# Altium PCB Current Sense.PcbDoc
Units mil, origin at the board's own origin, x right, y up, seen from the top; angles counter-clockwise.
Board outline 2150 x 3130 mil, 2 copper layers (Top Layer, Bottom Layer); 26 components, 19 nets, 72 pads, 45 vias.
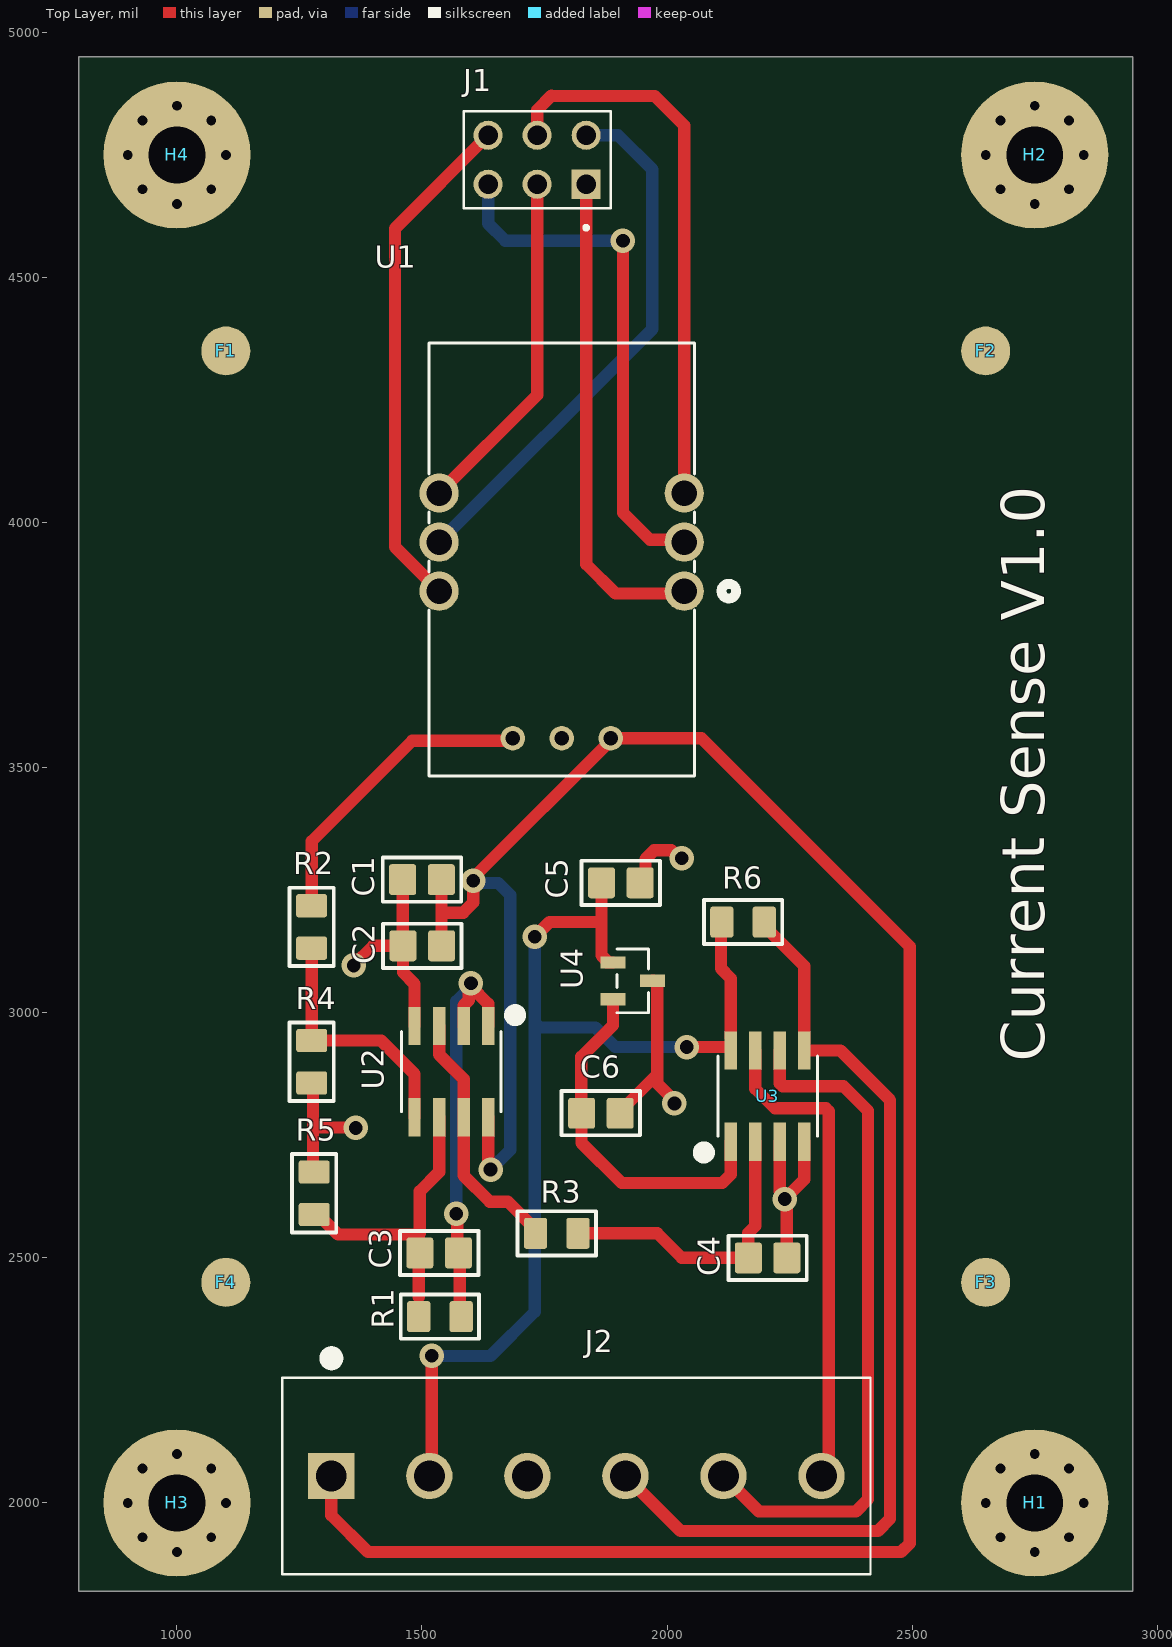
[diagram p0: Top Layer view]
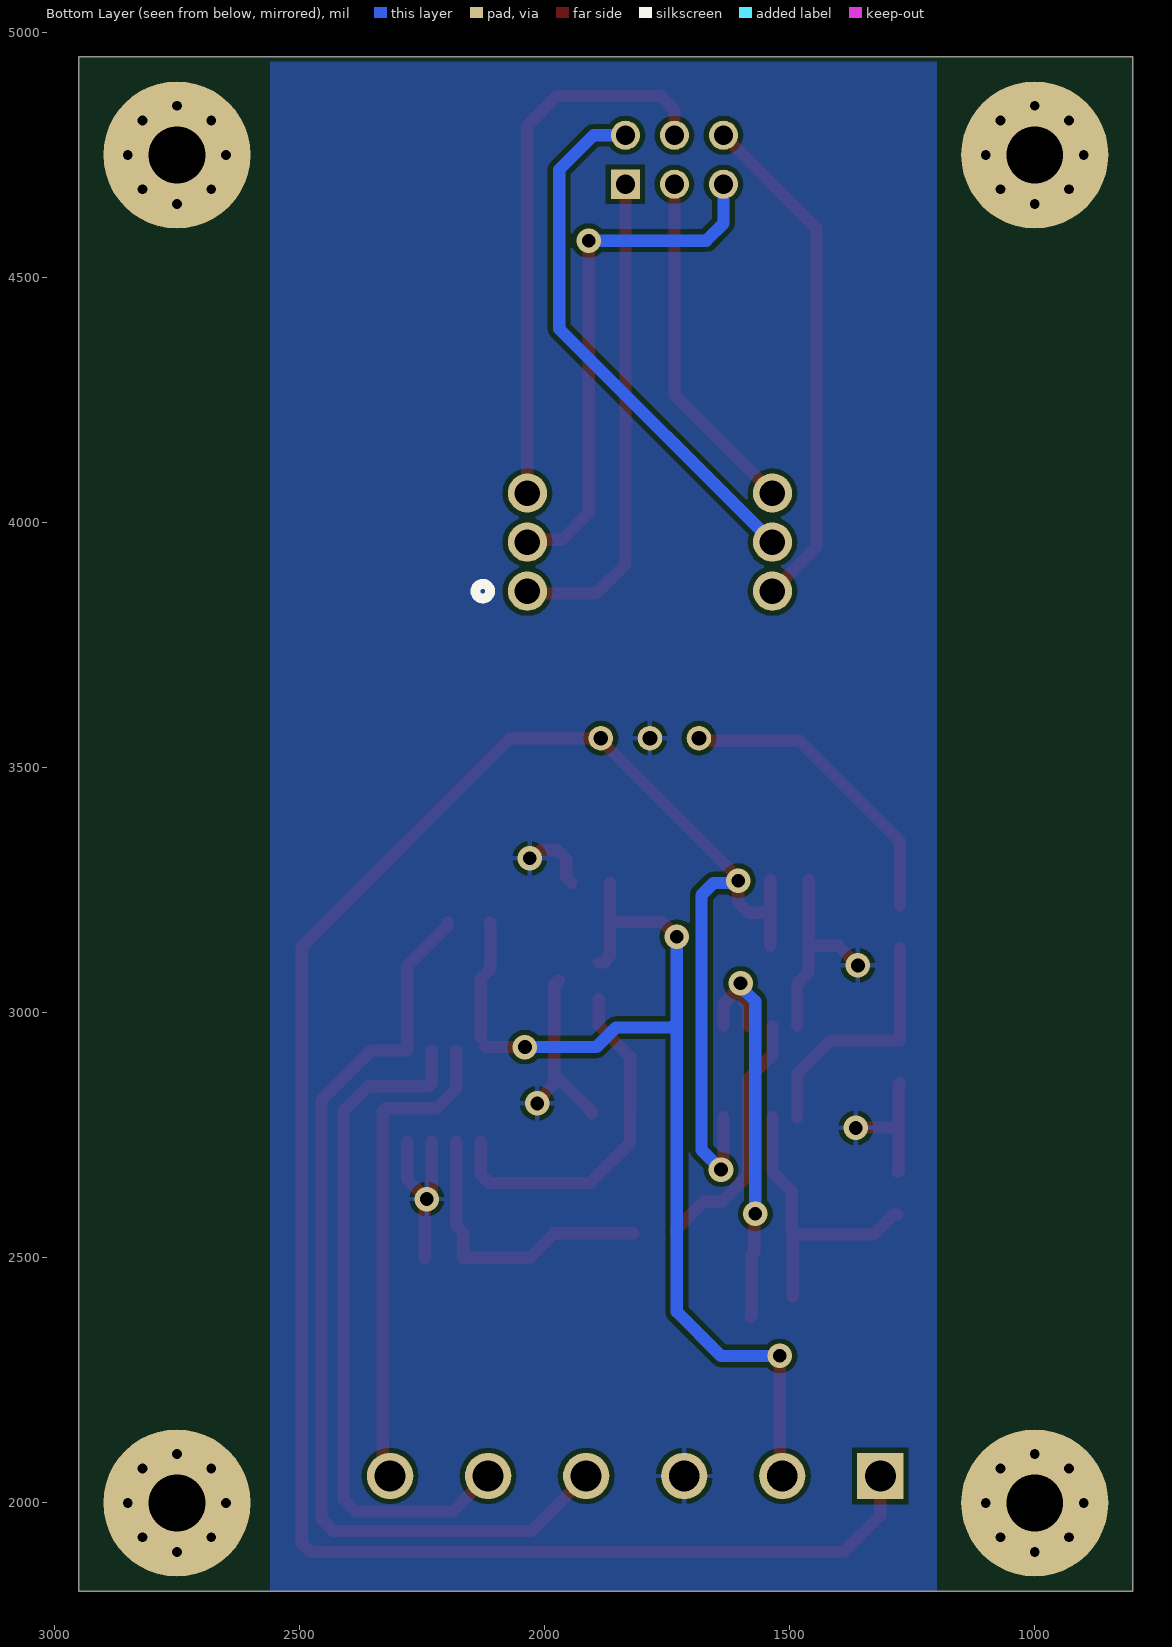
[diagram p1: Bottom Layer view, seen from below]
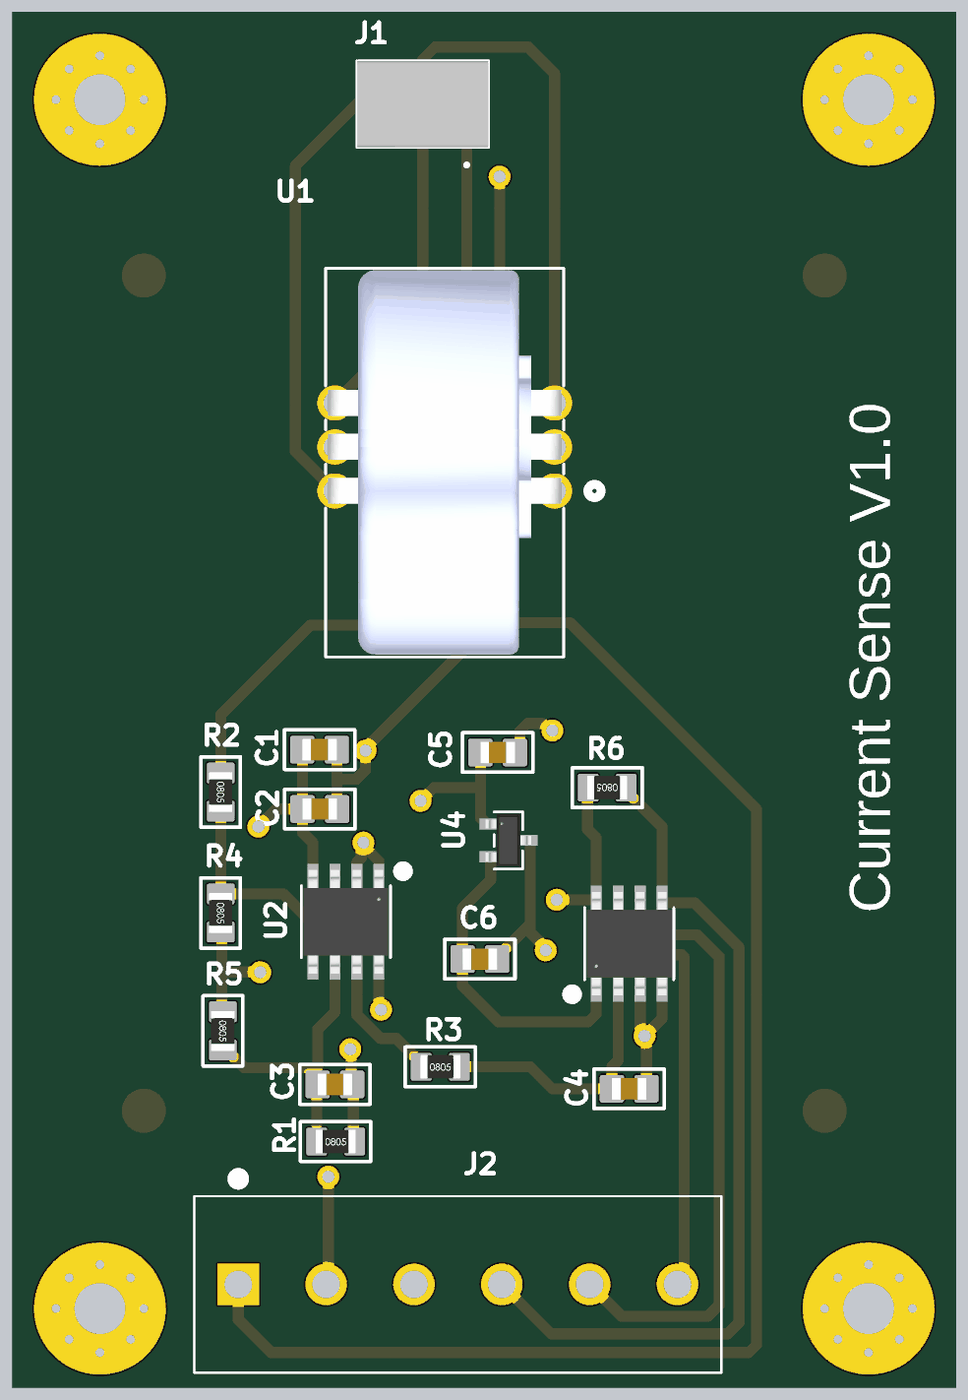
[diagram p2: 3D render of the assembled board from above, using the file's embedded part models]

## Layer stack, top to bottom
Top Solder: solder mask 0.4, Solder Resist, Dk 3.5
Top Layer: signal copper 1.4
Dielectric 1: dielectric 12.6, FR-4, Dk 4.8
Bottom Layer: signal copper 1.4
Bottom Solder: solder mask 0.4, Solder Resist, Dk 3.5

## Board outline
800,1820 2950,1820 2950,4950 800,4950

## Design rules (kind name [scope] priority, off if disabled: settings)
Clearance [All] p1: gap=10 ignorepadtopadclearanceinfootprint=FALSE except(0: Arc-Hole Track-Hole SMDPad-Hole THPad-Hole Via-Hole Fill-Hole Poly-Hole Region-Hole Text-Hole)
PolygonConnect [All] p1: connectstyle=Relief reliefconductorwidth=10 reliefentries=4 polygonreliefangle="90 Angle" airgapwidth=10
RoutingVias [All] p1: holewidth=28 width=50 viastyle="Through Hole" minholewidth=28 minwidth=50 maxholewidth=28 maxwidth=50
SolderMaskExpansion [All] p1: expansion=4 istentingtop=FALSE
Width [All] p1: maxlimit=50 minlimit=10 preferedwidth=20
30 further rules are at their usual default settings.

## Classes and differential pairs
net class Sense_A[0..5]: Sense_A0 Sense_A1 Sense_A2 Sense_A3 Sense_A4 Sense_A5

## Components (designator, comment, footprint, x,y, rotation, side; value= is the part's Value field where it differs from the comment)
C1 "0.1 uF" C0805E 1500,3271.5 r0 top
C2 "0.1 uF" C0805E 1500.63,3136.5 r0 top
C3 "0.01 uF" C0805E 1535,2510 r0 top
C4 "1 uF" C0805E 2205,2500 r180 top
C5 "0.1 uF" C0805E 1905.63,3265 r180 top
C6 "0.1 uF" C0805E 1865,2795 r180 top
F1 "Fiducial 200mil" FIDU_100mil 1100,4350 r0 top
F2 "Fiducial 200mil" FIDU_100mil 2650,4350 r0 top
F3 "Fiducial 200mil" FIDU_100mil 2650,2450 r0 top
F4 "Fiducial 200mil" FIDU_100mil 1100,2450 r0 top
H1 "4-40 Hole" "4-40 Hole" 2750,2000 r0 top
H2 "4-40 Hole" "4-40 Hole" 2750,4750 r0 top
H3 "4-40 Hole" "4-40 Hole" 1000,2000 r0 top
H4 "4-40 Hole" "4-40 Hole" 1000,4750 r0 top
J1 "826925-3 Header 3x2" TE_826925-3 1735,4740 r180 top
J2 "TB004-508-06BE" CUI_TB004-508-06BE 1315,2055 r0 top
R1 "56k" R0805E 1536.69,2380 r0 top
R2 "56k" R0805E 1275,3175 r270 top
R3 "100" R0805E 1775,2550 r0 top
R4 "20k" R0805E 1275,2900 r270 top
R5 "75k" R0805E 1280,2631.69 r270 top
R6 "10k" R0805E 2155,3185 r180 top
U1 "LTS6-NP" "LTS 6-NP_LEM" 2035,3860 r180 top
U2 "MCP6072T-E/SN" SOIC8-N_MC_MCH 1560,2880 r270 top
U3 "MCP3201T-CI/SN" SOIC8-N_MC_MCH 2205,2830 r90 top
U4 "MAX6106EUR+T" 21-0051H_MXM 1930,3065 r270 top

## Footprints (in the part's own frame and the unit in brackets; to place one, negate y for a bottom-side part, rotate by r counter-clockwise, add the part's x,y. Pads: shape width x height; smd on the part's side, far side on the other; paste and mask are expansions set on the pad)
"4-40 Hole" [mil]
  round 300 hole 116: 1(0,0)
21-0051H_MXM [mil]
  rect 25x51 smd paste+0 mask+0: 1(-37.4,-40.5) 2(37.4,-40.5) 3(0,40.5)
  silkscreen extent -65,-33 65,33, body extent -60,-52 60,52, height 44
C0805E [mm] "CHIP Capacitor, 2.0X1.3mm, 0805, EXPANDED PAD"
  rrect20% 1.4x1.6 smd mask+0.1: 1(-1,0) 2(1,0)
  Top Layer pour cut-out: -0.5,0.8 0.5,0.8 0.5,-0.8 -0.5,-0.8
  silkscreen extent -2.03,-1.14 2.03,1.14, body extent -1,-0.62 1,0.63, height 1
CUI_TB004-508-06BE [mm]
  rect 2.4x2.4 / inner round 2.4 / far side rect 2.4x2.4 hole 1.6: 1(0,0)
  round 2.4 hole 1.6: 2(5.08,0) 3(10.16,0) 4(15.24,0) 5(20.32,0) 6(25.4,0)
  silkscreen extent -2.54,-5.1 27.94,6.4
FIDU_100mil [mil]
  round 100 smd paste-500 mask-500: 1(0,0)
"LTS 6-NP_LEM" [mil]
  round 80 hole 52 mask+0: 1(0,0) 2(0,-100) 3(0,-200) 4(500,-200) 5(500,-100) 6(500,0)
  round 50 hole 30: 7(150,300) 8(250,300) 9(350,300)
  silkscreen extent -106,-507 521,377, body extent -15,-502 516,372, height 945
R0805E [mm] "CHIP RESISTOR 1/8 WATT ,2.0X1.3mm, 0805, EXPANDED PAD"
  rrect20% 1.2x1.6 smd mask+0.1: 1(-1.1,0) 2(1.1,0)
  Top Layer pour cut-out: -0.5,0.8 0.5,0.8 0.5,-0.8 -0.5,-0.8
  silkscreen extent -2.03,-1.14 2.03,1.14, body extent -1.15,-0.67 1.15,0.68, height 0.76
SOIC8-N_MC_MCH [mil]
  rect 78x25 smd paste+0 mask+0: 1(-93,75) 2(-93,25) 3(-93,-25) 4(-93,-75) 5(93,-75) 6(93,-25) 7(93,25) 8(93,75)
  silkscreen extent -125,-102 82,140, body extent -118,-96 118,96, height 69
TE_826925-3 [mm]
  rect 1.508x1.508 hole 1: 1(-2.54,1.27)
  round 1.508 hole 1: 2(0,1.27) 3(2.54,1.27) 4(-2.54,-1.27) 5(0,-1.27) 6(2.54,-1.27)
  silkscreen extent -3.81,-2.52 3.81,3.62, body extent -3.81,-2.5 3.81,2.5, height 9.51

## Part data
C1 C2 C5 C6: library part 08055C104JAT2A, "0805 100nF 50 V ±5 % Tolerance X7R Surface Mount Multilayer Ceramic Capacitor", Capacitance=100nF, Case Code (Imperial)=0805, Case Code (Metric)=2012, Dielectric=X7R, Dielectric Material=Ceramic, Insulation Resistance=100GR, Manufacturer="Kyocera AVX", Max Operating Temperature=125°C, Min Operating Temperature=-55°C, Package Quantity=4000, Supplier Part Number 1=478-3352-1-ND, Tolerance=5%, Voltage=50V, Case/Package=0805, Category="Ceramic Capacitors", ComponentLink1Description=https://datasheet.ciiva.com/27054/1929381-27054902.pdf?src-supplier=Jameco, ComponentLink1URL=https://datasheet.ciiva.com/27054/1929381-27054902.pdf?src-supplier=Jameco, ComponentLink2Description=https://datasheet.ciiva.com/16199/cx5r-16199661.pdf?src-supplier=Future+Electronics, ComponentLink2URL=https://datasheet.ciiva.com/16199/cx5r-16199661.pdf?src-supplier=Future+Electronics, ComponentLink3Description=https://datasheet.ciiva.com/15212/getdatasheetpartid-110198-15212571.pdf?src-supplier=Verical, ComponentLink3URL=https://datasheet.ciiva.com/15212/getdatasheetpartid-110198-15212571.pdf?src-supplier=Verical, ComponentLink4Description=https://datasheet.ciiva.com/7812/cx7r-7812074.pdf?src-supplier=Element14, ComponentLink4URL=https://datasheet.ciiva.com/7812/cx7r-7812074.pdf?src-supplier=Element14, ComponentLink5Description=https://datasheet.ciiva.com/7812/cx7r-7812075.pdf?src-supplier=Element14, ComponentLink5URL=https://datasheet.ciiva.com/7812/cx7r-7812075.pdf?src-supplier=Element14, ComponentLink6Description=https://datasheet.ciiva.com/7812/cx7r-7812076.pdf?src-supplier=Element14, ComponentLink6URL=https://datasheet.ciiva.com/7812/cx7r-7812076.pdf?src-supplier=Element14, ComponentLink7Description=https://datasheet.ciiva.com/28683/cx7r-28683529.pdf?src-supplier=Element14, ComponentLink7URL=https://datasheet.ciiva.com/28683/cx7r-28683529.pdf?src-supplier=Element14, ComponentLink8Description=https://datasheet.ciiva.com/150/cx7r-150564.pdf?src-supplier=Digi-Key, ComponentLink8URL=https://datasheet.ciiva.com/150/cx7r-150564.pdf?src-supplier=Digi-Key, ComponentLink9Description=https://datasheet.ciiva.com/150/cx7r-150563.pdf?src-supplier=Digi-Key, ComponentLink9URL=https://datasheet.ciiva.com/150/cx7r-150563.pdf?src-supplier=Digi-Key, ComponentLink10Description=https://datasheet.ciiva.com/150/cx7r-150565.pdf?src-supplier=Digi-Key, ComponentLink10URL=https://datasheet.ciiva.com/150/cx7r-150565.pdf?src-supplier=Digi-Key, ComponentLink11Description=https://datasheet.ciiva.com/14590/70001075-14590237.pdf?src-supplier=Allied+Electronics, ComponentLink11URL=https://datasheet.ciiva.com/14590/70001075-14590237.pdf?src-supplier=Allied+Electronics, Construction=Flat, Contact Plating=Tin,Matte, Depth=1.25mm, Dissipation Factor=2.5%, Height=0.94mm, Lead Free="Lead Free", Length=2.01mm, Manufacturer Part Number=08055C104JAT2A, Mount="Surface Mount,PCB", Number of Pins=2, Packaging="Tape and Reel", Pricing 1="1=0.12000, 10=0.08500, 50=0.04820, 100=0.03990, 500=0.02800, 1000=0.02318 (USD)", Radiation Hardening=No, Reach SVHC Compliant=Yes, RoHS=Yes, RoHS Compliant=Yes, Series=-, Stock 1=734747, Supplier 1=Digi-Key, Termination=SMD/SMT, Thickness=0.037inch, Voltage Rating=50V, Voltage Rating (DC)=50V, Width=1.25mm
C3: library part 08051C103J4Z2A, "0805 0.01 uF 100 V ±5 % Tolerance X7R SMT Multilayer Ceramic Capacitor", Capacitance=10nF, Case Code (Imperial)=0805, Case Code (Metric)=2012, Dielectric=X7R, Manufacturer="Kyocera AVX", Max Operating Temperature=125°C, Min Operating Temperature=-55°C, Ratings=AEC-Q200, Supplier Part Number 1=478-9933-1-ND, Tolerance=5%, Voltage Rating=100V, Case/Package=0805, Category="Ceramic Capacitors", ComponentLink1Description=http://datasheets.avx.com/FlexitermMLCC.pdf?src-supplier=Digi-Key, ComponentLink1URL=http://datasheets.avx.com/FlexitermMLCC.pdf?src-supplier=Digi-Key, Features="Soft Termination", Length=0.079inch, Manufacturer Part Number=08051C103J4Z2A, Mount="Surface Mount", Packaging="Tape and Reel", Pricing 1="1=0.11000, 10=0.07500, 50=0.04240, 100=0.03510, 500=0.02464, 1000=0.02040 (USD)", RoHS=Yes, RoHS Compliant=Yes, Stock 1=228064, Supplier 1=Digi-Key, Thickness=0.037inch, Voltage Rating (DC)=100V, Width=0.049inch
C4: library part 08053C105JAT2A, "0805 1 uF 25 V ±5 % Tolerance X7R Surface Mount Multilayer Ceramic Capacitor", Capacitance=1uF, Case Code (Imperial)=0805, Case Code (Metric)=2012, Dielectric=X7R, Manufacturer="Kyocera AVX", Max Operating Temperature=125°C, Min Operating Temperature=-55°C, Package Quantity=2000, Supplier Part Number 1=478-10487-1-ND, Tolerance=5%, Voltage Rating=25V, Case/Package=0805, Category="Ceramic Capacitors", ComponentLink1Description=https://datasheet.ciiva.com/221/cx7r-221690.pdf?src-supplier=Digi-Key, ComponentLink1URL=https://datasheet.ciiva.com/221/cx7r-221690.pdf?src-supplier=Digi-Key, ComponentLink2Description=https://datasheet.ciiva.com/5419/cx7r-218113-5419770.pdf?src-supplier=Mouser, ComponentLink2URL=https://datasheet.ciiva.com/5419/cx7r-218113-5419770.pdf?src-supplier=Mouser, ComponentLink3Description=https://datasheet.ciiva.com/11499/cx7r-11499836.pdf?src-supplier=Avnet, ComponentLink3URL=https://datasheet.ciiva.com/11499/cx7r-11499836.pdf?src-supplier=Avnet, ComponentLink4Description=https://datasheet.ciiva.com/28586/1679506-28586091.pdf?src-supplier=Element14, ComponentLink4URL=https://datasheet.ciiva.com/28586/1679506-28586091.pdf?src-supplier=Element14, Construction=Flat, Contact Plating=Tin,Matte, Depth=1.25mm, Height=1.4mm, Lead Free="Lead Free", Length=2.01mm, Manufacturer Part Number=08053C105JAT2A, Mount="Surface Mount", Number of Pins=2, Packaging="Tape and Reel", Pricing 1="1=0.32000, 10=0.22200, 50=0.15560, 100=0.13330, 500=0.10000, 1000=0.08444 (USD)", Radiation Hardening=No, Reach SVHC Compliant=Yes, RoHS=Yes, RoHS Compliant=Yes, Series=-, Stock 1=90689, Supplier 1=Digi-Key, Termination=SMD/SMT, Thickness=0.037inch, Voltage Rating (DC)=25V, Width=0.049inch
F1 F2 F3 F4: library part FIDU_100mil
J1: library part 826925-3, "Conn Unshrouded Header HDR 6 POS 2.54mm Solder ST Thru-Hole Automotive Carton", Color=Green, Contact Current Rating=5A, Current Rating=3A, Flammability Rating="UL94 V-0", High Temperature Housing=No, Manufacturer="TE Connectivity", Max Operating Temperature=105°C, Min Operating Temperature=-65°C, Package Quantity=800, Supplier Part Number 1=A106478-ND, Board Standoff="No (Without)", Category=Connectors, ComponentLink1Description=https://datasheet.ciiva.com/11749/0900766b80d7c469-11749304.pdf?src-supplier=RSComponents, ComponentLink1URL=https://datasheet.ciiva.com/11749/0900766b80d7c469-11749304.pdf?src-supplier=RSComponents, ComponentLink2Description=https://datasheet.ciiva.com/29369/001094812-da-01-en-stiftleiste-2-reihig-0-0826925-3-29369737.pdf?src-supplier=Conrad, ComponentLink2URL=https://datasheet.ciiva.com/29369/001094812-da-01-en-stiftleiste-2-reihig-0-0826925-3-29369737.pdf?src-supplier=Conrad, ComponentLink3Description=https://datasheet.ciiva.com/6856/eng-cd-826629-aa-basefilename-6856442.pdf?src-supplier=Digi-Key, ComponentLink3URL=https://datasheet.ciiva.com/6856/eng-cd-826629-aa-basefilename-6856442.pdf?src-supplier=Digi-Key, ComponentLink4Description=https://datasheet.ciiva.com/16403/eng-cd-826925-p-16403547.pdf?src-supplier=Future+Electronics, ComponentLink4URL=https://datasheet.ciiva.com/16403/eng-cd-826925-p-16403547.pdf?src-supplier=Future+Electronics, ComponentLink5Description=https://datasheet.ciiva.com/7800/38081-7800235.pdf?src-supplier=Element14, ComponentLink5URL=https://datasheet.ciiva.com/7800/38081-7800235.pdf?src-supplier=Element14, Connector Type=Plug,Header,Pin, Contact Finish - Mating=TIN, Contact Gender=Male, Contact Material=Bronze, Contact Mating Length=6.7mm, Contact Plating=Tin, Contact Post Length=0.1259inch, Contact Protection="No (Without)", Contact Shape=Square, Contact Type="Male Pin", Depth=5mm, ELV=Compliant, Fastening Type=Pull, Gasket="No (Without)", Gender=Male, High Speed Serial Data Connector=No, Housing Color=Green, Housing Material=PBT, Insulation Color=Green, Insulation Material=PBT, Keyed=No, Lead Free="Lead Free", Lead Pitch=2.54mm, Manufacturer Part Number=826925-3, Mating Alignment="No (Without)", Mating Connector Lock="No (Without)", Mount="Through Hole", Number of Contacts=6, Number of Poles=6, Number of Positions=6, Number of Rows=2, Orientation=Straight, Packaging=Carton, PCB Mount Retention=Without, Pin Length=6.7mm, Pitch=2.54mm, Plating Thickness=2um, Pricing 1="1=0.79000, 10=0.67100, 100=0.60220, 500=0.49268, 1000=0.43794, 5000=0.38319, 10000=0.36403 (USD)", Radiation Hardening=No, Reach SVHC Compliant=Yes, RoHS=Yes, RoHS Compliant=Yes, Row Spacing=2.54mm, Selectively Loaded="No (Without)", Series="AMPMODU MOD II", Stabilizers="No (Without)", Stock 1=9795, Strain Relief="No (Without)", Supplier 1=Digi-Key, Termination="Through Hole"
J2: "2~24 Poles, Screw Type, Horizontal, 5.08 Pitch, 24~12 (AWG), Terminal Block Connector", Manufacturer=CUI, Supplier Part Number 1=102-6183-ND, Manufacturer Part Number=TB004-508-06BE, RoHS=Yes, Supplier 1=Digi-Key
R1 R2: library part RK73H2ATTD5602F, "Res Thick Film 0805 56K Ohm 1% 0.25W(1/4W) ±100ppm/C Pad SMD Automotive T/R", Case Code (Imperial)=0805, Case Code (Metric)=2012, Manufacturer="KOA Speer", Max Operating Temperature=155°C, Min Operating Temperature=-55°C, Package Quantity=5000, Power Rating=125mW, Resistance=56kR, Resistance Tolerance=1%, Resistor Type="Thick Film", Supplier Part Number 1=2019-RK73H2ATTD5602FCT-ND, Temperature Coefficient=100ppm/°C, Voltage Rating=150V, Case/Package=0805, Category="Chip SMD Resistors", ComponentLink1Description=https://datasheet.ciiva.com/7706/549017-7706126.pdf?src-supplier=Element14, ComponentLink1URL=https://datasheet.ciiva.com/7706/549017-7706126.pdf?src-supplier=Element14, Construction=Rectangular, Depth=1.25mm, Height=0.5mm, Lead Free="Lead Free", Length=2mm, Manufacturer Part Number=RK73H2ATTD5602F, Military Standard=Not, Number of Pins=2, Packaging="Tape and Reel", Pricing 1="1=0.10000, 10=0.03800, 100=0.01530, 1000=0.00688, 2500=0.00597 (USD)", RoHS=Yes, RoHS Compliant=Yes, Series=RK73H, Stock 1=74990, Supplier 1=Digi-Key, Termination=SMD/SMT, Tolerance=1%, Width=1.25mm
R3: library part RNCP0805FTD100R, "Res Thin Film 0805 100 Ohm 1% 0.25W(1/4W) ±100ppm/C Sulfur Resistant Pad SMD T/R", Case Code (Imperial)=0805, Case Code (Metric)=2012, Manufacturer="Stackpole Electronics", Max Operating Temperature=155°C, Max Power Dissipation=250mW, Min Operating Temperature=-55°C, Resistance=100R, Resistor Type="Thin Film", Supplier Part Number 1=RNCP0805FTD100RCT-ND, Temperature Coefficient=100ppm/°C, Tolerance=1%, Case/Package=0805, Category="Chip SMD Resistors", ComponentLink1Description=http://www.seielect.com/Catalog/SEI-rncp.pdf?src-supplier=Digi-Key, ComponentLink1URL=http://www.seielect.com/Catalog/SEI-rncp.pdf?src-supplier=Digi-Key, ComponentLink2Description=https://www.seielect.com/catalog/SEI-Packaging.pdf?src-supplier=Digi-Key, ComponentLink2URL=https://www.seielect.com/catalog/SEI-Packaging.pdf?src-supplier=Digi-Key, Features="Moisture Resistant,Anti-Sulfur", Height=0.024inch, Lead Free="Lead Free", Length=0.079inch, Manufacturer Part Number=RNCP0805FTD100R, Mount="Surface Mount", Number of Terminations=2, Packaging="Tape and Reel", Pricing 1="1=0.10000, 10=0.07300, 100=0.02970, 500=0.01814, 1000=0.01336, 2500=0.01159 (USD)", RoHS=Yes, RoHS Compliant=Yes, Series=RNCP, Stock 1=461793, Supplier 1=Digi-Key, Width=0.049inch
R4: library part RNCP0805FTD20K0, "Res Thin Film 0805 20K Ohm 1% 0.25W(1/4W) ±100ppm/C Sulfur Resistant Pad SMD T/R", Case Code (Imperial)=0805, Case Code (Metric)=2012, Manufacturer="Stackpole Electronics", Max Operating Temperature=155°C, Max Power Dissipation=250mW, Min Operating Temperature=-55°C, Resistance=20kR, Resistor Type="Thin Film", Supplier Part Number 1=RNCP0805FTD20K0CT-ND, Temperature Coefficient=100ppm/°C, Tolerance=1%, Case/Package=0805, Category="Chip SMD Resistors", ComponentLink1Description=https://www.seielect.com/catalog/SEI-Packaging.pdf?src-supplier=Digi-Key, ComponentLink1URL=https://www.seielect.com/catalog/SEI-Packaging.pdf?src-supplier=Digi-Key, ComponentLink2Description=http://www.seielect.com/Catalog/SEI-rncp.pdf?src-supplier=Digi-Key, ComponentLink2URL=http://www.seielect.com/Catalog/SEI-rncp.pdf?src-supplier=Digi-Key, Features="Moisture Resistant,Anti-Sulfur", Height=0.024inch, Lead Free="Lead Free", Length=0.079inch, Manufacturer Part Number=RNCP0805FTD20K0, Mount="Surface Mount", Number of Terminations=2, Packaging="Tape and Reel", Pricing 1="1=0.10000, 10=0.07300, 100=0.02970, 500=0.01814, 1000=0.01336, 2500=0.01159 (USD)", RoHS=Yes, RoHS Compliant=Yes, Series=RNCP, Stock 1=159169, Supplier 1=Digi-Key, Width=0.049inch
R5: library part RNCP0805FTD75K0, "Res Thin Film 0805 75K Ohm 1% 0.25W(1/4W) ±100ppm/C Sulfur Resistant Pad SMD T/R", Case Code (Imperial)=0805, Case Code (Metric)=2012, Manufacturer="Stackpole Electronics", Max Operating Temperature=155°C, Max Power Dissipation=250mW, Min Operating Temperature=-55°C, Resistance=75kR, Resistor Type="Thin Film", Supplier Part Number 1=RNCP0805FTD75K0CT-ND, Temperature Coefficient=100ppm/°C, Tolerance=1%, Case/Package=0805, Category="Chip SMD Resistors", ComponentLink1Description=http://www.seielect.com/Catalog/SEI-rncp.pdf?src-supplier=Digi-Key, ComponentLink1URL=http://www.seielect.com/Catalog/SEI-rncp.pdf?src-supplier=Digi-Key, Features="Moisture Resistant,Anti-Sulfur", Height=0.024inch, Length=0.079inch, Manufacturer Part Number=RNCP0805FTD75K0, Mount="Surface Mount", Number of Terminations=2, Packaging="Tape and Reel", Pricing 1="1=0.10000, 10=0.07300, 100=0.02970, 500=0.01814, 1000=0.01336, 2500=0.01159 (USD)", RoHS=Yes, RoHS Compliant=Yes, Series=RNCP, Stock 1=28880, Supplier 1=Digi-Key, Width=0.049inch
R6: library part RNCP0805FTD10K0, "Res Thin Film 0805 10K Ohm 1% 1/4W ±100ppm/°C Molded SMD Paper T/R", Case Code (Imperial)=0805, Case Code (Metric)=2012, Manufacturer="Stackpole Electronics", Max Operating Temperature=155°C, Max Power Dissipation=250mW, Min Operating Temperature=-55°C, Resistance=10kR, Resistor Type="Thin Film", Supplier Part Number 1=RNCP0805FTD10K0CT-ND, Temperature Coefficient=100ppm/°C, Tolerance=1%, Case/Package=0805, Category="Chip SMD Resistors", ComponentLink1Description=https://www.seielect.com/catalog/SEI-Packaging.pdf?src-supplier=Digi-Key, ComponentLink1URL=https://www.seielect.com/catalog/SEI-Packaging.pdf?src-supplier=Digi-Key, Features="Moisture Resistant,Anti-Sulfur", Height=0.024inch, Lead Free="Lead Free", Length=0.079inch, Manufacturer Part Number=RNCP0805FTD10K0, Mount="Surface Mount", Number of Terminations=2, Packaging="Tape and Reel", Pricing 1="1=0.10000, 10=0.07300, 100=0.02970, 500=0.01814, 1000=0.01336, 2500=0.01159 (USD)", RoHS=Yes, RoHS Compliant=Yes, Series=RNCP, Stock 1=596473, Supplier 1=Digi-Key, Width=0.049inch
U1: "Sensor Current Hall 6A Ac/dc", Current Rating=6A, Frequency=200kHz, Manufacturer=LEM, Max Operating Temperature=85°C, Max Supply Voltage (DC)=5.25V, Min Operating Temperature=-40°C, Min Supply Voltage (DC)=4.75V, Operating Supply Voltage=5V, Output Voltage=2.5V, Package Quantity=50, Supplier Part Number 1=398-1000-ND, Accuracy=0.2%, Category="Current Sensors", ComponentLink1Description=https://datasheet.ciiva.com/2812/lts206-np-2812480.pdf?src-supplier=Digi-Key, ComponentLink1URL=https://datasheet.ciiva.com/2812/lts206-np-2812480.pdf?src-supplier=Digi-Key, ComponentLink2Description=https://datasheet.ciiva.com/3327/07696305-3327466.pdf?src-supplier=Distrelec, ComponentLink2URL=https://datasheet.ciiva.com/3327/07696305-3327466.pdf?src-supplier=Distrelec, Current Sensing=6A, Height=23.5mm, Lead Free="Lead Free", Linearity=0.1%, Manufacturer Part Number=LTS6-NP, Mount="Through Hole,PCB", Number of Channels=1, Packaging=Bulk, Polarity=Bidirectional, Pricing 1="1=18.62000, 5=18.24000, 10=15.20000, 25=14.06000, 50=13.68000, 100=11.78000 (USD)", Reach SVHC Compliant=Yes, Response Time=0.4us, RoHS=Yes, RoHS Compliant=Yes, Sensitivity=104.16mV/A, Series=LTS, Stock 1=150, Supplier 1=Digi-Key, Wire/Cable Diameter=3.2mm
U2: "Op Amp Dual Precision Amplifier R-R I/O 6V Automotive 8-Pin SOIC N T/R", Case/Package=SOIC, Input Bias Current=100pA, Input Offset Voltage (Vos)=150uV, Manufacturer=Microchip, Max Operating Temperature=125°C, Max Supply Voltage=6V, Min Operating Temperature=-40°C, Min Supply Voltage=1.8V, Nominal Supply Current=110uA, Output Current=28mA, Package Quantity=3300, Power Supply Rejection Ratio (PSRR)=70dB, Supplier Part Number 1=MCP6072T-E/SNCT-ND, Voltage Gain=115dB, Amplifier Type="GENERAL PURPOSE", Category="Amplifiers - Op Amps, Buffer, Instrumentation", Common Mode Rejection Ratio=72dB, ComponentLink1Description=https://datasheet.ciiva.com/11711/22142-b-mcp6071-11711098.pdf?src-supplier=Avnet, ComponentLink1URL=https://datasheet.ciiva.com/11711/22142-b-mcp6071-11711098.pdf?src-supplier=Avnet, ComponentLink2Description=https://datasheet.ciiva.com/16450/filehandler-aspxddocname-en540513-16450534.pdf?src-supplier=Future+Electronics, ComponentLink2URL=https://datasheet.ciiva.com/16450/filehandler-aspxddocname-en540513-16450534.pdf?src-supplier=Future+Electronics, ComponentLink3Description=https://datasheet.ciiva.com/1793/22142-b-mcp6071-1793649.pdf?src-supplier=Digi-Key, ComponentLink3URL=https://datasheet.ciiva.com/1793/22142-b-mcp6071-1793649.pdf?src-supplier=Digi-Key, Gain Bandwidth Product=1.2MHz, Input Offset Voltage-Max=150uV, Lead Free="Lead Free", Manufacturer Part Number=MCP6072T-E/SN, Mount="Surface Mount", Number of Channels=2, Number of Circuits=2, Number of Elements=2, Number of Pins=8, Operating Supply Current=110uA, Output Current per Channel=28mA, Packaging="Tape and Reel", Pricing 1="1=1.19000, 25=0.99640, 100=0.91500 (USD)", Radiation Hardening=No, RoHS=Yes, RoHS Compliant=Yes, Series=-, Slew Rate=0.5V/µs, Slew Rate-Nom=0.5V/µs, Stock 1=94538, Supplier 1=Digi-Key, Supply Current=110uA, Technology=CMOS, Unity Gain Bandwidth Product=1.2MHz
U3: "1-Channel Single ADC SAR 100ksps 12-bit Serial Automotive 8-Pin SOIC N T/R", Case/Package="SOIC N", Manufacturer=Microchip, Max Operating Temperature=85°C, Max Supply Voltage=5.5V, Min Operating Temperature=-40°C, Min Supply Voltage=2.7V, Operating Supply Voltage=5V, Package Quantity=1, Supplier Part Number 1=MCP3201T-CI/SNCT-ND, Category="Analog to Digital Converters (ADCs)", ComponentLink1Description=https://datasheet.ciiva.com/26923/getdatasheetpartid-786492-26923007.pdf?src-supplier=Verical, ComponentLink1URL=https://datasheet.ciiva.com/26923/getdatasheetpartid-786492-26923007.pdf?src-supplier=Verical, ComponentLink2Description=https://datasheet.ciiva.com/16389/filehandler-aspxddocname-en011279-16389286.pdf?src-supplier=Future+Electronics, ComponentLink2URL=https://datasheet.ciiva.com/16389/filehandler-aspxddocname-en011279-16389286.pdf?src-supplier=Future+Electronics, ComponentLink3Description=https://datasheet.ciiva.com/6666/21290f-6666382.pdf?src-supplier=Digi-Key, ComponentLink3URL=https://datasheet.ciiva.com/6666/21290f-6666382.pdf?src-supplier=Digi-Key, Contact Plating=Tin,Matte, Conversion Rate=100KS/s, Differential Nonlinearity=1LSB, Full Scale Error=5LSB, Input Type=SINGLE-ENDED, Integral Nonlinearity (INL)=2LSB, Interface=SPI,Serial,3-WIRE, Lead Free="Lead Free", Manufacturer Part Number=MCP3201T-CI/SN, Mount="Surface Mount", Number of A/D Converters=1, Number of Analog Inputs=1, Number of Bits=12, Number of Channels=1, Number of Converters=1, Number of Elements=1, Number of Inputs=1, Number of Pins=8, Packaging="Tape and Reel", Polarity=Unipolar, Pricing 1="1=3.04000, 25=2.54400, 100=2.31080 (USD)", Radiation Hardening=No, Resolution=12b, RoHS=Yes, RoHS Compliant=Yes, Sampling Rate=100KS/s, Stock 1=15019, Supplier 1=Digi-Key, Supply Type=Single
U4: "MAX6106 Series 2.056 V ±0.4 % Surface Mount Series Voltage Reference - SOT-23", Case/Package=SOT-23-3, Manufacturer=Maxim, Max Input Voltage=12.6V, Max Operating Temperature=85°C, Max Output Current=5mA, Max Output Voltage=2.056V, Max Supply Current=125uA, Min Input Voltage=2.5V, Min Operating Temperature=-40°C, Min Output Voltage=2.048V, Package Quantity=1, Supplier Part Number 1=700-MAX6106EURT, Temperature Coefficient=75ppm/°C, Tolerance=0.4%, Category="Voltage References", ComponentLink1Description=https://datasheet.ciiva.com/4908/max6100-max6107-87505-4908032.pdf?src-supplier=Mouser, ComponentLink1URL=https://datasheet.ciiva.com/4908/max6100-max6107-87505-4908032.pdf?src-supplier=Mouser, ComponentLink2Description=https://datasheet.ciiva.com/30476/0900766b811dea62-30476381.pdf?src-supplier=RSComponents, ComponentLink2URL=https://datasheet.ciiva.com/30476/0900766b811dea62-30476381.pdf?src-supplier=RSComponents, ComponentLink3Description=https://datasheet.ciiva.com/14198/max6100-max6107-14198841.pdf?src-supplier=Avnet, ComponentLink3URL=https://datasheet.ciiva.com/14198/max6100-max6107-14198841.pdf?src-supplier=Avnet, ComponentLink4Description=https://datasheet.ciiva.com/2008/max6100-max6107-2008213.pdf?src-supplier=Digi-Key, ComponentLink4URL=https://datasheet.ciiva.com/2008/max6100-max6107-2008213.pdf?src-supplier=Digi-Key, Height=1.02mm, Lead Free="Lead Free", Length=3.04mm, Manufacturer Part Number=MAX6106EUR+T, Mount="Surface Mount", Number of Pins=3, Operating Supply Current=125uA, Output Current=5mA, Output Type=Fixed, Output Voltage=2.048V, Packaging="Tape and Reel", Pricing 1="1=1.47000, 10=1.33000, 50=1.25000, 100=1.07000, 1000=0.75000, 10000=0.72400 (USD)", Radiation Hardening=No, Reference Type=Series,Fixed, Reference Voltage=2.048V, RoHS=Yes, RoHS Compliant=Yes, Series=-, Stock 1=14807, Supplier 1=Mouser, Width=1.4mm

## Via types
v1: diameter 50, hole 20, Top Layer to Bottom Layer, 32 vias
v2: diameter 50, hole 28, Top Layer to Bottom Layer, 13 vias

## Nets (pads, with @x,y where several pads share a name; then routed paths per layer and width w, separated by ;. In a path a pad name is that pad's centre, name@x,y a point inside that pad or via, vN(x,y) a via of type N, cw(c..) or ccw(c..) an arc to the next point about the centre after c; other vN are vias at no path point)
3V3: C5.2 J2.2 R6.2 U3.8 U4.1 | length 2242.6
  Top Layer w25: J2.2 1520,2060 v2(1520,2300) ; v2(1730,3155) 1760,3185 1866.26,3185 ; C5.2 1866.26,3185 ; U4.1 1876.5,3102.4 1876.5,3106.81 1866.26,3117.05 1866.26,3185 ; v2(2040,2930) U3.8@2120,2930 ; R6.2 2110,3183.31 2110,3090 2130,3070 U3.8@2130,2950
  Bottom Layer w25: v2(1520,2300) 1640,2300 1730,2390 1730,2980 ; v2(1730,3155) 1730,2980 ; v2(2040,2930) 1894.12,2930 1854.12,2970 1740,2970 1730,2980
5V: C1.2 C2.2 J2.1 U1.7 U2.8 | length 4726.5
  Top Layer w25: J2.1 1315,1975 1390,1900 2477.43,1900 2495,1917.57 2495,3135 2070,3560 1889.53,3560 v2@1604.76,3275.24 ; C1.2 1539.69,3271.18 1539.69,3204 ; C2.2 1539.69,3136.81 1539.69,3204 ; v2(1604.76,3269.31) 1604.76,3224.76 1584,3204 1539.69,3204 ; U2.8 1635,2691.76 1640,2686.76 v2(1640,2680)
  Bottom Layer w25: v2(1604.76,3269.31) 1609.55,3264.53 1655.47,3264.53 1680,3240 1680,2720 v2(1640,2680)
GND: C1.1 C2.1 C4.1 C5.1 C6.1 J2.3 R4.2 R5.1 U1.8 U2.4 U3.3 U3.4 U4.3 | length 1572.9
  Top Layer w25: R4.2 1277.5,2854.19 1277.5,2765.85 ; R5.1 1277.5,2677.5 1277.5,2765.85 ; v2(1360.63,3096.5) 1400.63,3136.5 C2.1 ; v2(1365,2765) 1364.15,2765.85 1277.5,2765.85 ; C1.1 1460.94,3271.18 1460.94,3136.81 C2.1 ; U2.4 1485,3058.77 1461.26,3082.51 C2.1 ; C6.1 1904.37,2798.94 1980,2874.57 ; C5.1 1955.83,3275.83 1955.83,3313.64 1973.4,3331.21 2008.37,3331.21 2024.59,3315 v2(2030,3315) ; U4.3 1972.5,3065 1980,3057.5 1980,2874.57 ; v2(2015,2815) 2015,2820.41 1980,2855.41 1980,2874.57 ; U3.3 2230,2635.41 2240,2625.41 v2(2240,2620) 2280,2660 U3.4 ; C4.1 v2@2244.37,2598.96
NetC3_1: C3.1 R1.1 R5.2 U2.6 | length 611.3
  Top Layer w25: R5.2 1287.87,2588.39 1328.5,2547.76 1493.39,2547.76 1493.39,2420 ; 1495.63,2550 1495.63,2635.63 1535,2675 U2.6
NetC3_2: C3.2 R1.2 U2.1 U2.2 | length 891.3
  Top Layer w25: v2(1570,2590) 1572.19,2587.81 1572.19,2512.18 C3.2 1577.19,2507.18 1577.19,2382.81 R1.2 ; U2.2 1585,3015 1595.22,3025.22 1595.22,3055.22 v2(1600,3060) 1600,3053.24 1635,3018.24 U2.1
  Bottom Layer w25: v2(1570,2590) 1570,3023.24 1600,3053.24 v2(1600,3060)
NetC4_2: C4.2 R3.2 U3.2 | length 611
  Top Layer w25: R3.2 1980,2550 2030,2500 C4.2 2165.63,2550.63 2180,2565 U3.2
NetC6_2: C6.2 U3.1 U4.2 | length 732.8
  Top Layer w25: U4.2 1889.5,2974.5 1825,2910 1825,2795.63 C6.2 1825.63,2734.37 1907.57,2652.43 2112.43,2652.43 2130,2670 U3.1
NetJ2_4: J2.4 R6.1 U3.5 | length 1963.7
  Top Layer w25: J2.4 2027.24,1942.76 2430.18,1942.76 2455,1967.57 2455,2821.72 2353.72,2923 U3.5 2280,3095.43 2198.31,3177.13 R6.1
NetJ2_5: J2.5 U3.6 | length 1397.9
  Top Layer w25: J2.5 2187.24,1982.76 2385.18,1982.76 2410,2007.57 2410,2800 2360,2850 2235.86,2850 2230,2855.86 U3.6
NetJ2_6: J2.6 U3.7 | length 997.4
  Top Layer w25: U3.7 2180,2845 2220,2805 2324.14,2805 2330,2799.14 2330,2070 J2.6
NetR2_1: R2.1 U1.9 | length 628.7
  Top Layer w25: R2.1 1275,3350 1480,3555 1680,3555 U1.9
NetR2_2: R2.2 R4.1 U2.5 | length 514.7
  Top Layer w25: R2.2 R4.1 1416.69,2943.31 1485,2875 U2.5
NetR3_1: R3.1 U2.3 U2.7 | length 526
  Top Layer w25: U2.3 1535,2915 1585,2865 U2.7 1585,2667.82 1638.16,2614.66 1674.91,2614.66 1731.69,2557.87 R3.1
Sense_A0: J1.1 U1.1 | length 1001.9
  Top Layer w25: J1.1 1835,3915 1895,3855 2030,3855 U1.1
Sense_A1: J1.3 U1.2 | length 1074.4
  Top Layer w25: v2(1910,4575) 1910,4020 1965,3965 2030,3965 U1.2
  Bottom Layer w25: J1.3 1635,4610 1670,4575 v2(1910,4575)
Sense_A2: J1.5 U1.3 | length 1139
  Top Layer w25: J1.5 1735,4841.72 1764.14,4870.86 1765,4870 1975,4870 2035,4810 U1.3
Sense_A3: J1.2 U1.4 | length 712.8
  Top Layer w25: U1.4 1735,4260 J1.2
Sense_A4: J1.4 U1.5 | length 1104.2
  Bottom Layer w25: U1.5 1970,4395 1970,4720 1900,4790 J1.4
Sense_A5: J1.6 U1.6 | length 1046
  Top Layer w25: U1.6 1445,3950 1445,4600 J1.6
pads on no net: F1.1 F2.1 F3.1 F4.1 H1.1 H2.1 H3.1 H4.1
copper on no net:
  other v1: 1000,1900 2750,1900 930,1930 1070,1930 2680,1930 2820,1930 900,2000 1100,2000 2650,2000 2850,2000 930,2070 1070,2070 2680,2070 2820,2070 1000,2100 2750,2100 1000,4650 2750,4650 930,4680 1070,4680 2680,4680 2820,4680 900,4750 1100,4750 2650,4750 2850,4750 930,4820 1070,4820 2680,4820 2820,4820 1000,4850 2750,4850

## Polygon pours and split planes (outlines as drawn)
GND on Bottom Layer "GND_L02_P001" (solid, pour order 1): 1200,4940 1200,1820 2560,1820 2560,4940

## Silkscreen, mask and mechanical layers (free items; w line width, h text height)
Top Overlay:
  text "Current Sense V1.0" at 2798.33,2900 h150 r90